# EAGLE board UCube_v2_tower (EAGLE 6.1)
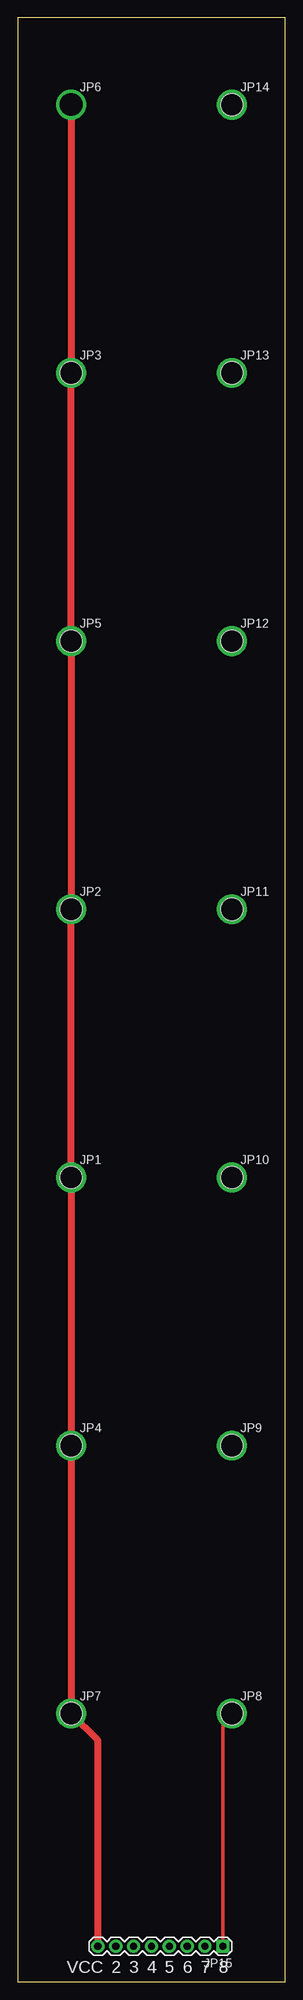
[diagram p0: board, top side]
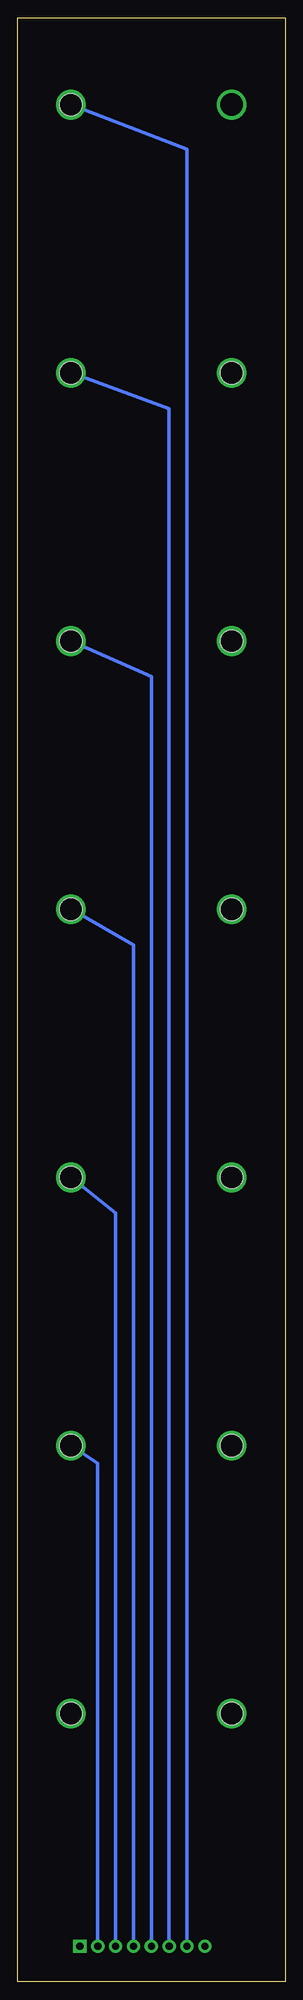
[diagram p1: board, bottom side, seen from below]

Size 38.08 x 279.07 mm. Coordinates in mm from the lower left corner, seen from the top.
Outline: 0,0 38.08,0 38.08,279.07 0,279.07 0,0
Copper layers (1*16): Top 0.035mm / dielectric 1.5mm / Bottom 0.035mm
Design rules: minimum track width 10mil, minimum drill 24mil, track to track 8mil, track to pad 8mil, pad to pad 8mil, via to via 8mil, smd to smd 8mil, copper to edge 40mil, drill to drill 8mil, minimum pad ring 10mil, minimum via ring 8mil, stop-mask expansion 4mil, vias tented up to drill 0mil, thermal gap 10mil
Holes 3.2 mm at 30.48,266.7 30.48,228.6 7.62,228.6 7.62,190.5 30.48,190.5 30.48,152.4 7.62,152.4 7.62,114.3 30.48,114.3 30.48,76.2 7.62,76.2 7.62,38.1 30.48,38.1

## Footprints (pad centres in the part's own frame; a part is rotated, then mirrored left to right if it is on the bottom)
1X01-BEN = drill 3.2: 1 0,0
1X08 = drill 1.016 pad 1.88 square: 1 0,0 | drill 1.016 pad 1.88: 2 2.54,0; 3 5.08,0; 4 7.62,0; 5 10.16,0; 6 12.7,0; 7 15.24,0; 8 17.78,0

## Placement (x,y rotation side)
JP1  M01PTH  [1X01-BEN]  7.62,114.3 0 top
JP2  M01PTH  [1X01-BEN]  7.62,152.4 0 top
JP3  M01PTH  [1X01-BEN]  7.62,228.6 0 top
JP4  M01PTH  [1X01-BEN]  7.62,76.2 0 top
JP5  M01PTH  [1X01-BEN]  7.62,190.5 0 top
JP6  M01BEN  [1X01-BEN]  7.62,266.7 0 top
JP7  M01PTH  [1X01-BEN]  7.62,38.1 0 top
JP8  M01PTH  [1X01-BEN]  30.48,38.1 0 top
JP9  M01PTH  [1X01-BEN]  30.48,76.2 0 top
JP10  M01PTH  [1X01-BEN]  30.48,114.3 0 top
JP11  M01PTH  [1X01-BEN]  30.48,152.4 0 top
JP12  M01PTH  [1X01-BEN]  30.48,190.5 0 top
JP13  M01PTH  [1X01-BEN]  30.48,228.6 0 top
JP14  M01PTH  [1X01-BEN]  30.48,266.7 0 top
JP15  [1X08]  29.21,5.08 180 top

## Library data of the parts
JP1-JP14 = SparkFun2
JP15 = SparkFun

## Nets
N$1: JP8.1 JP15.1
N$2: JP9.1 JP15.2
N$3: JP10.1 JP15.3
N$4: JP11.1 JP15.4
N$5: JP12.1 JP15.5
N$6: JP13.1 JP15.6
N$7: JP14.1 JP15.7
VCC: JP1.1 JP2.1 JP3.1 JP4.1 JP5.1 JP6.1 JP7.1 JP15.8

## Tracks (layer width: path | path; a pad name or v marks a point on that pad's centre or on a via)
N$1
  Top 0.508: JP15.1 29.21,36.83 JP8.1
N$2
  Bottom 0.508: JP15.2 26.67,73.66 JP9.1
N$3
  Bottom 0.508: JP15.3 24.13,109.22 JP10.1
N$4
  Bottom 0.508: JP15.4 21.59,147.32 JP11.1
N$5
  Bottom 0.508: JP15.5 19.05,185.42 JP12.1
N$6
  Bottom 0.508: JP15.6 16.51,223.52 JP13.1
N$7
  Bottom 0.508: JP15.7 13.97,260.35 JP14.1
VCC
  Top 1.016: JP6.1 JP3.1 JP5.1 JP2.1 JP1.1 JP4.1 JP7.1 11.43,34.29 JP15.8

## Text on the board
tPlace: VCC | 2 | 3 | 4 | 5 | 6 | 7 | 8